# EAGLE board Complete (EAGLE 9.6.2)
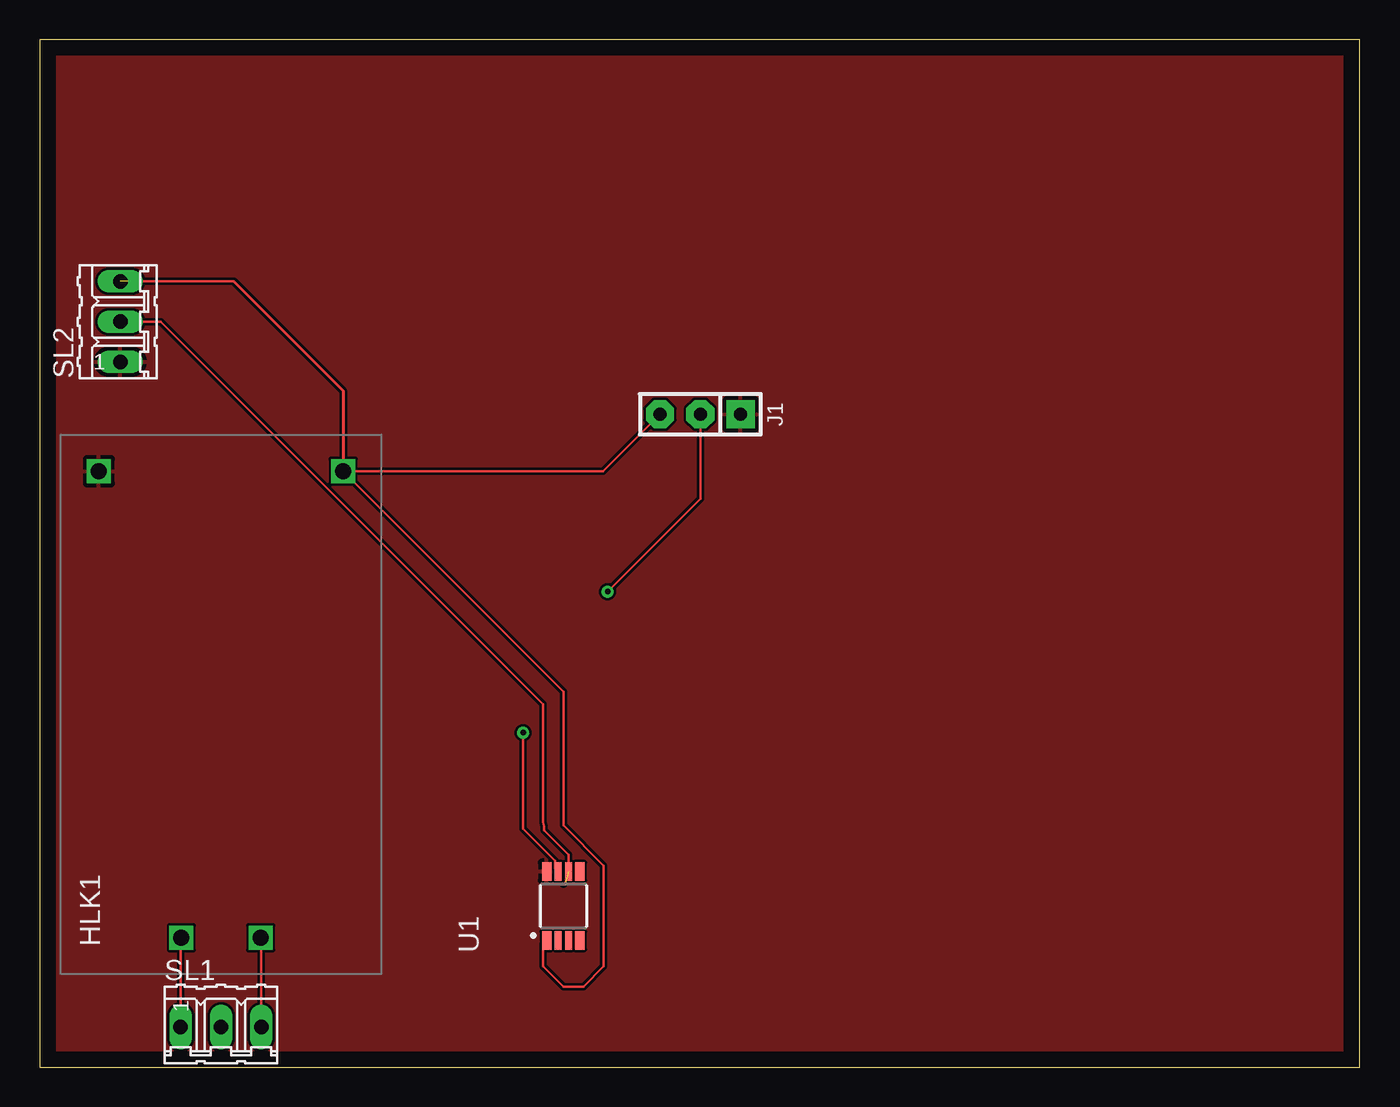
[diagram p0: board, top side]
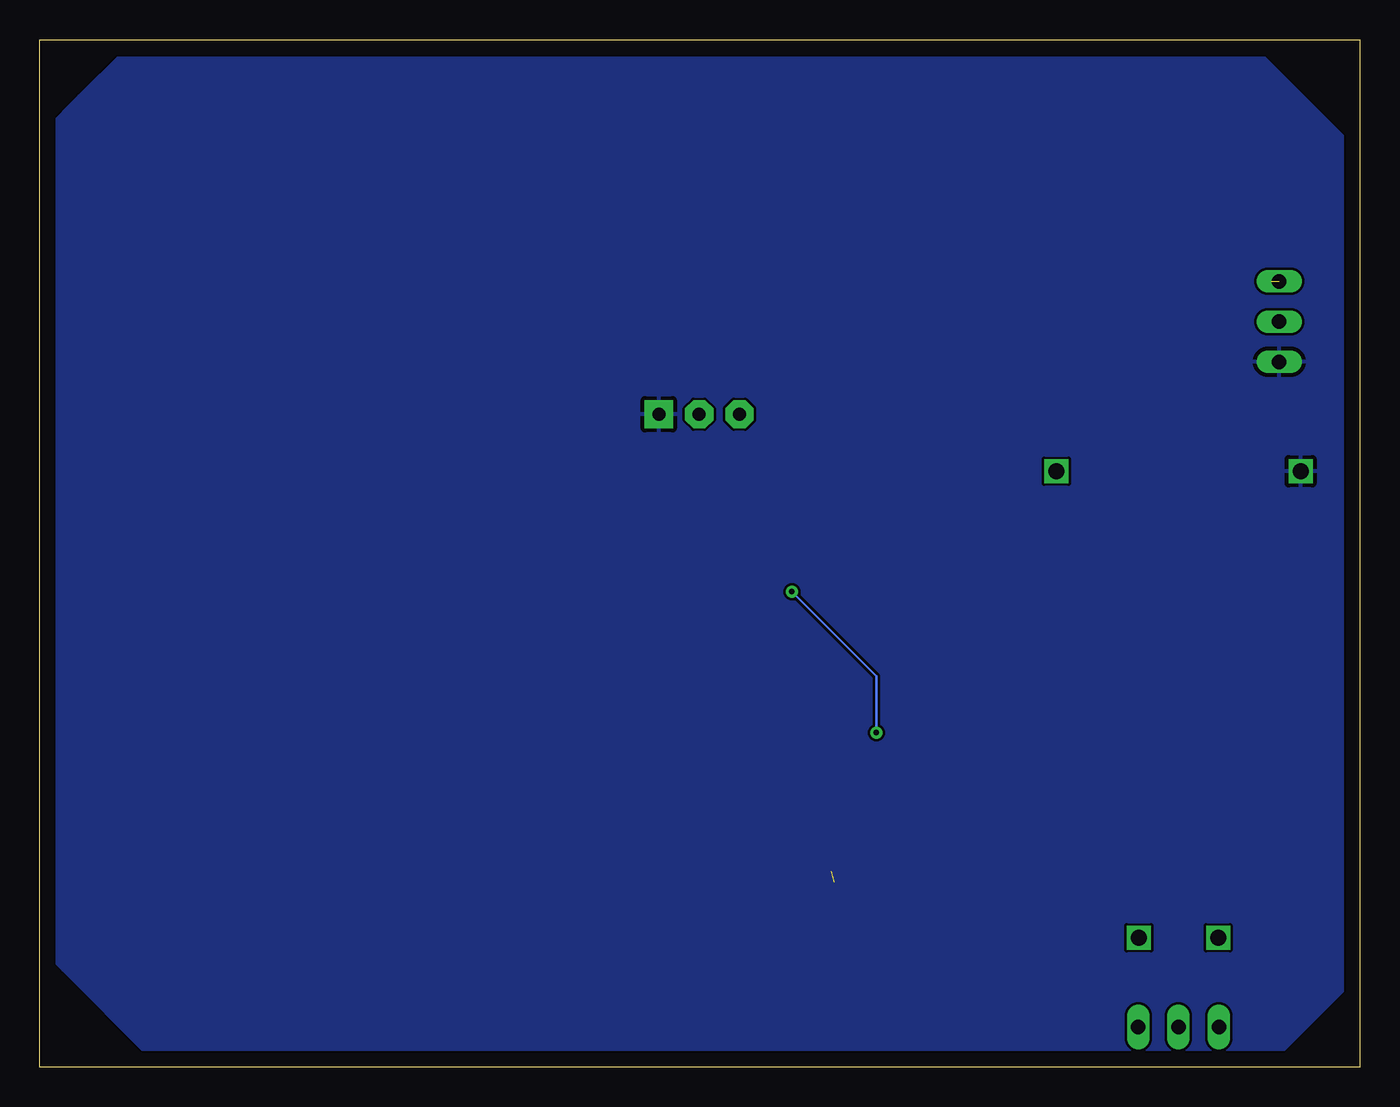
[diagram p1: board, bottom side, seen from below]

Size 83.24 x 64.76 mm. Coordinates in mm from the lower left corner, seen from the top.
Outline: 0,0 83.24,0 83.24,64.76 0,64.76 0,0
Copper layers (1*16): Top 0.035mm / dielectric 1.5mm / Bottom 0.035mm
Design rules "default": minimum track width 6mil, minimum drill 0.35mm, track to track 6mil, track to pad 6mil, pad to pad 6mil, via to via 6mil, smd to smd 6mil, copper to edge 40mil, drill to drill 6mil, minimum pad ring 10mil, minimum via ring 8mil, stop-mask expansion 4mil, vias tented up to drill 0mil, thermal gap 10mil

## Footprints (pad centres in the part's own frame; a part is rotated, then mirrored left to right if it is on the bottom)
HLK-PM01 = drill 1.016 square: P$1 -14.7,2.5; P$2 -14.7,-2.5; P$3 14.7,7.7; P$4 14.7,-7.7
SIP-100-03-32 = drill 0.813 pad 1.778 square: 1 -2.54,0 | drill 0.813 pad 1.778 octagon: 2 0,0; 3 2.54,0
03P = drill 0.914 long: 1 -2.54,0; 2 0,0; 3 2.54,0
MSOP8-MS = smd 0.6 x 1.15: 1 -1.05,-2.175; 4 1.05,-2.175; 5 1.05,2.175; 8 -1.05,2.175 | smd 0.45 x 1.15: 2 -0.325,-2.175; 3 0.325,-2.175; 6 0.325,2.175; 7 -0.325,2.175

## Placement (x,y rotation side)
HLK1  HLK-PM013W  [HLK-PM01]  11.43,22.86 90 top
J1  F-1X03-SIP-100-32  [SIP-100-03-32]  41.66,41.15 180 top
SL1  [03P]  11.43,2.54 0 top
SL2  [03P]  5.08,46.99 90 top
U1  PIC12F508/MS  [MSOP8-MS]  33.02,10.16 0 top

## Library data of the parts
HLK1 = HLK-PM01
J1 = con-headers-jp
SL1 SL2 = con-amp-quick; OC_FARNELL: unknown; OC_NEWARK: unknown
U1 = microchip_pic12f

## Nets
GND: HLK1.P$3 J1.1 SL2.1 U1.8
N$1: J1.2 U1.7
N$3: SL2.2 U1.6
N$4: HLK1.P$1 SL1.1
N$5: HLK1.P$2 SL1.3
N$6: HLK1.P$4 J1.3 SL2.3 U1.1

## Tracks (layer width: path | path; a pad name or v marks a point on that pad's centre or on a via)
GND
  pour Top: 0,64.77 0,0 82.8,0 82.8,64.77
  pour Bottom: 0.51,58.17 6.35,64.01 6.6,64.01 77.98,64.01 80.77,61.21 82.8,59.18 82.8,58.67 82.8,7.11 81.79,6.1 76.45,0.76 75.95,0.76 6.6,0.76 5.08,0.76 0.51,5.33
N$1  (via drill 0.35)
  Top 0.152: J1.2 41.66,35.81 v35.81,29.97 | U1.7 32.5,12.53 32.5,13.01 30.48,15.02 v30.48,21.08
  Bottom 0.152: v35.81,29.97 30.48,24.64 v30.48,21.08
N$3  (1 unrouted)
  Top 0.152: 33.15,11.66 33.02,11.54 | U1.6 33.34,13.39 31.79,14.94 31.79,15.2 31.75,15.43 31.75,22.86 7.62,46.99 SL2.2
N$4
  Top 0.152: SL1.1 8.89,8.12 HLK1.P$1
N$5
  Top 0.152: SL1.3 13.97,8.12 HLK1.P$2
N$6  (1 unrouted)
  Top 0.152: U1.1 31.75,7.76 31.75,6.35 33.02,5.08 34.29,5.08 35.56,6.35 35.56,12.7 33.02,15.24 33.02,23.67 HLK1.P$4 35.53,37.56 J1.3 | 12.24,49.53 5.59,49.53
  Top 0.203: 12.24,49.53 19.13,42.64 HLK1.P$4

## Text on the board
tTest: Smart Light | Rebase It | V 1.0 | VCC | Signal | VCC | Signal | GND | GND | VDD | Vcc